# Altium PCB final.PcbDoc
Units mm, origin at the board's own origin, x right, y up, seen from the top; angles counter-clockwise.
Board outline 50 x 40 mm, 2 copper layers (Top Layer, Bottom Layer); 29 components, 28 nets, 114 pads, 26 vias.
Unrouted connection lines stored in the file: 75.
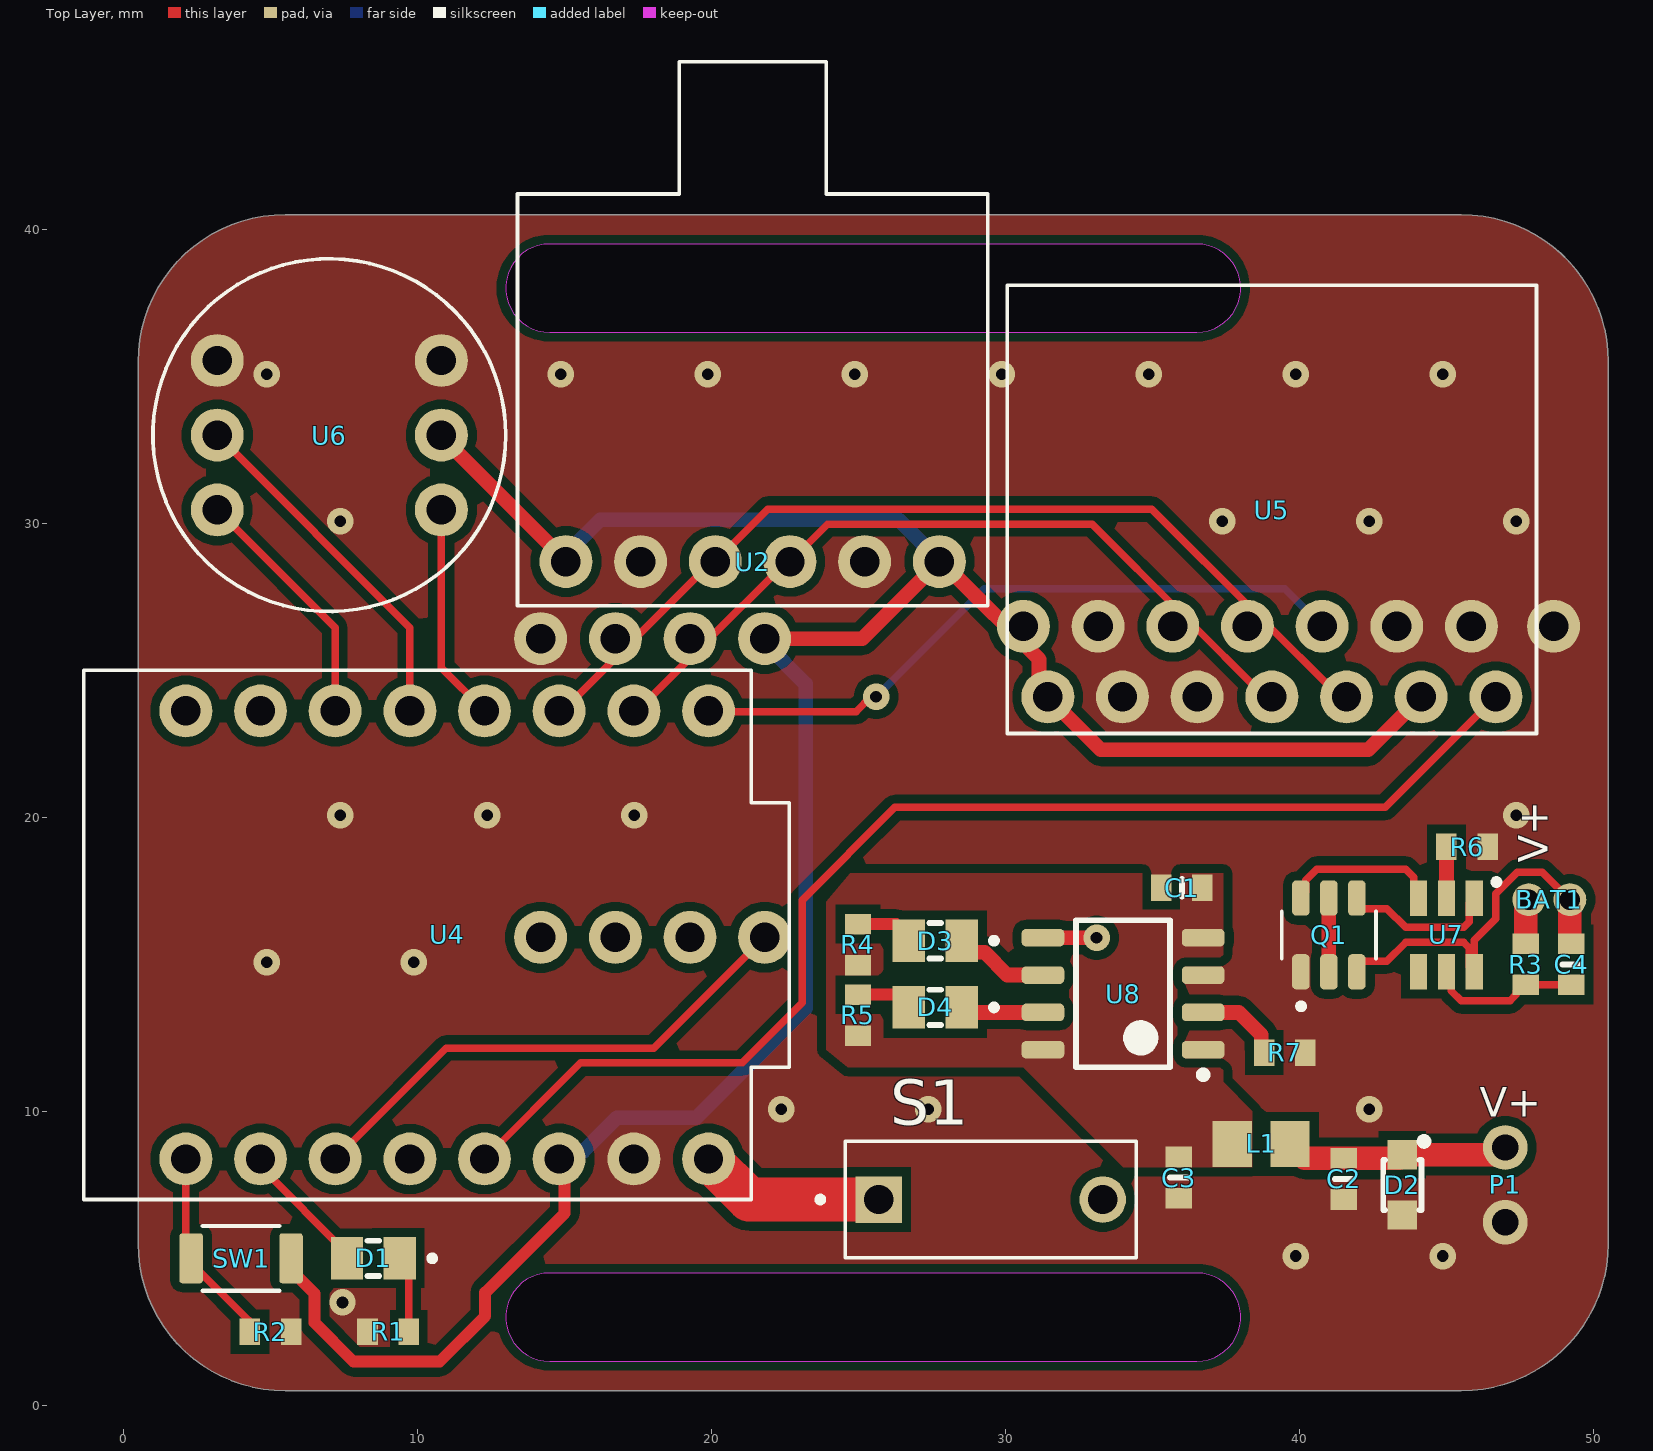
[diagram p0: Top Layer view]
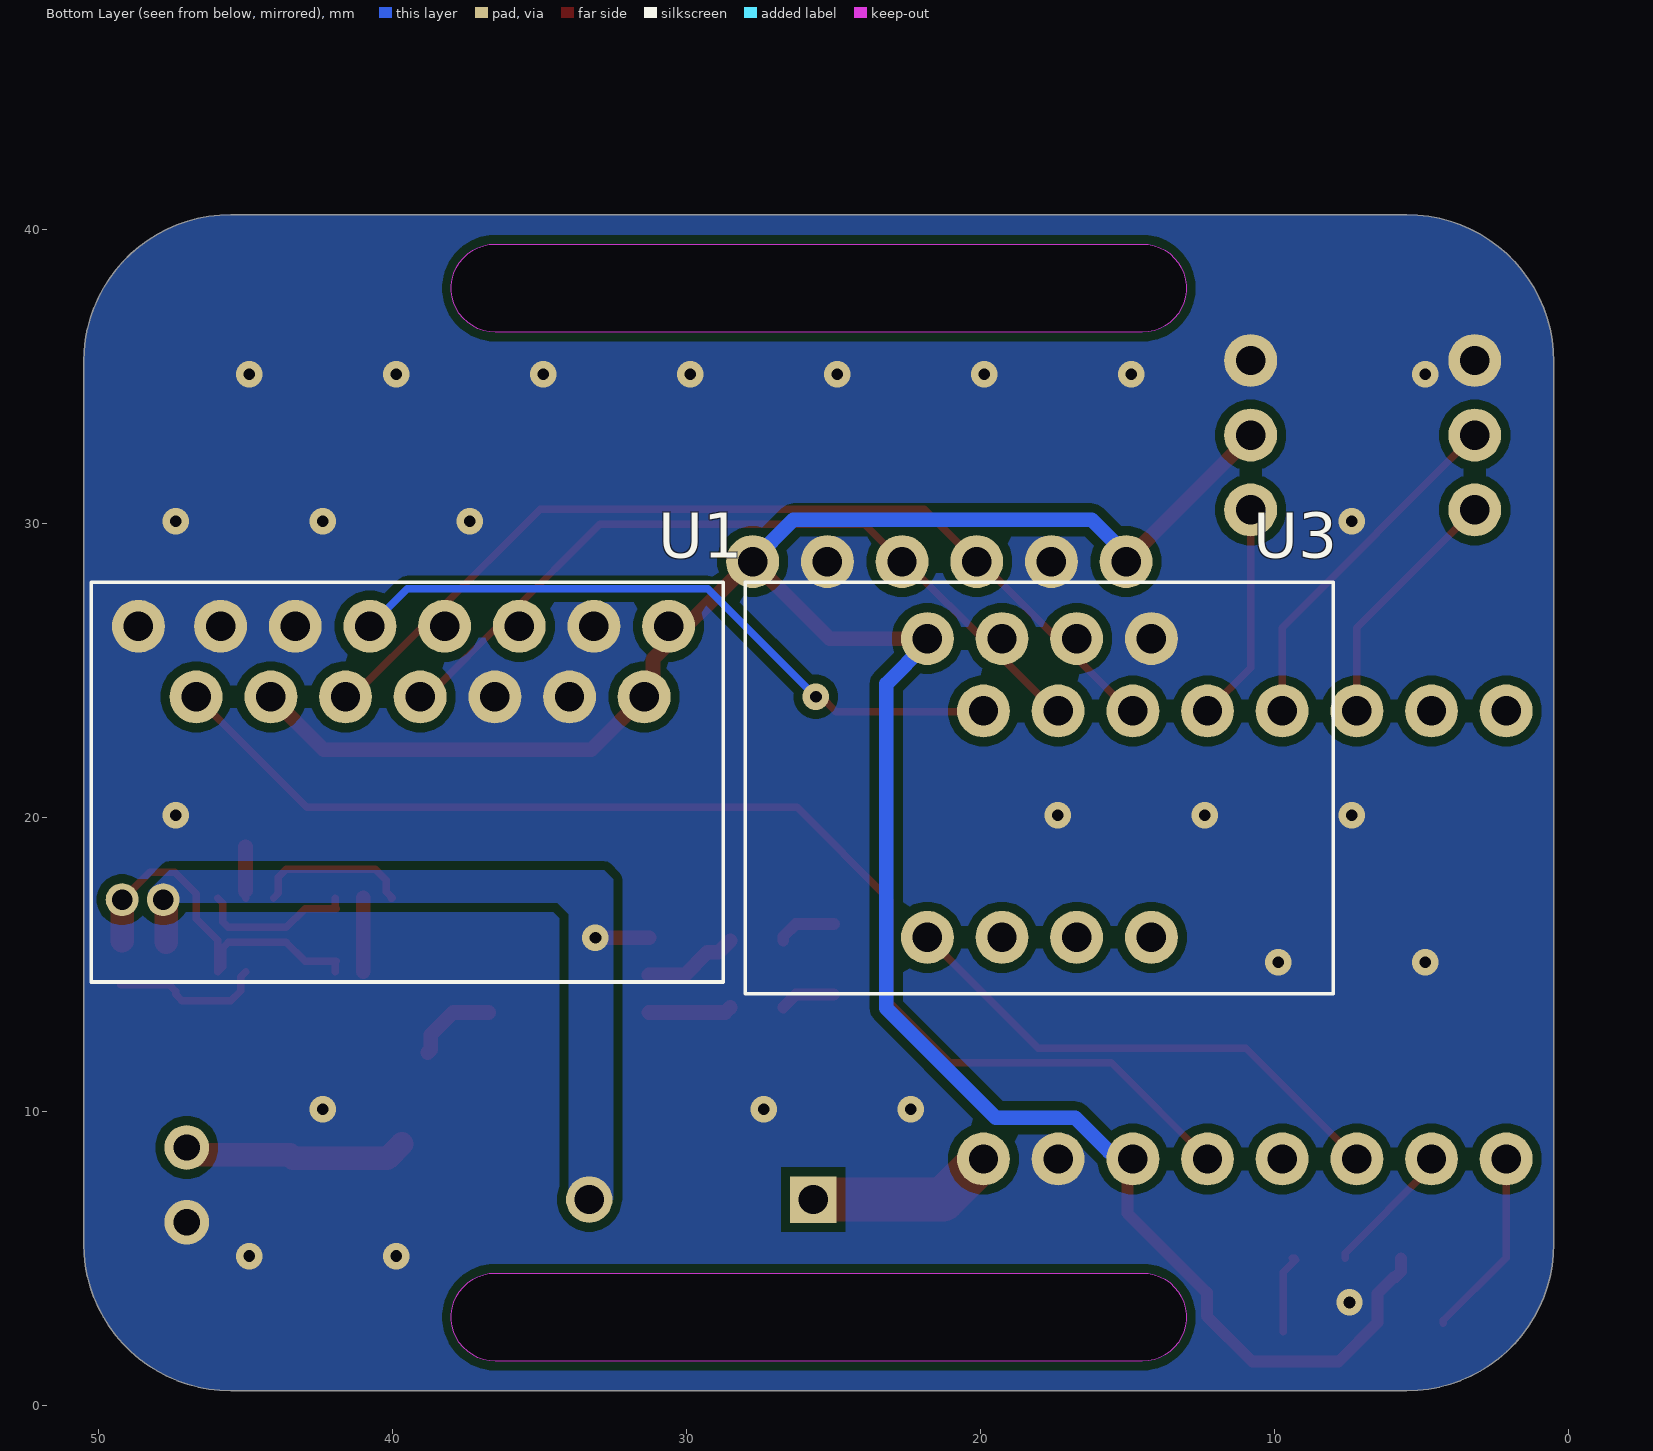
[diagram p1: Bottom Layer view, seen from below]
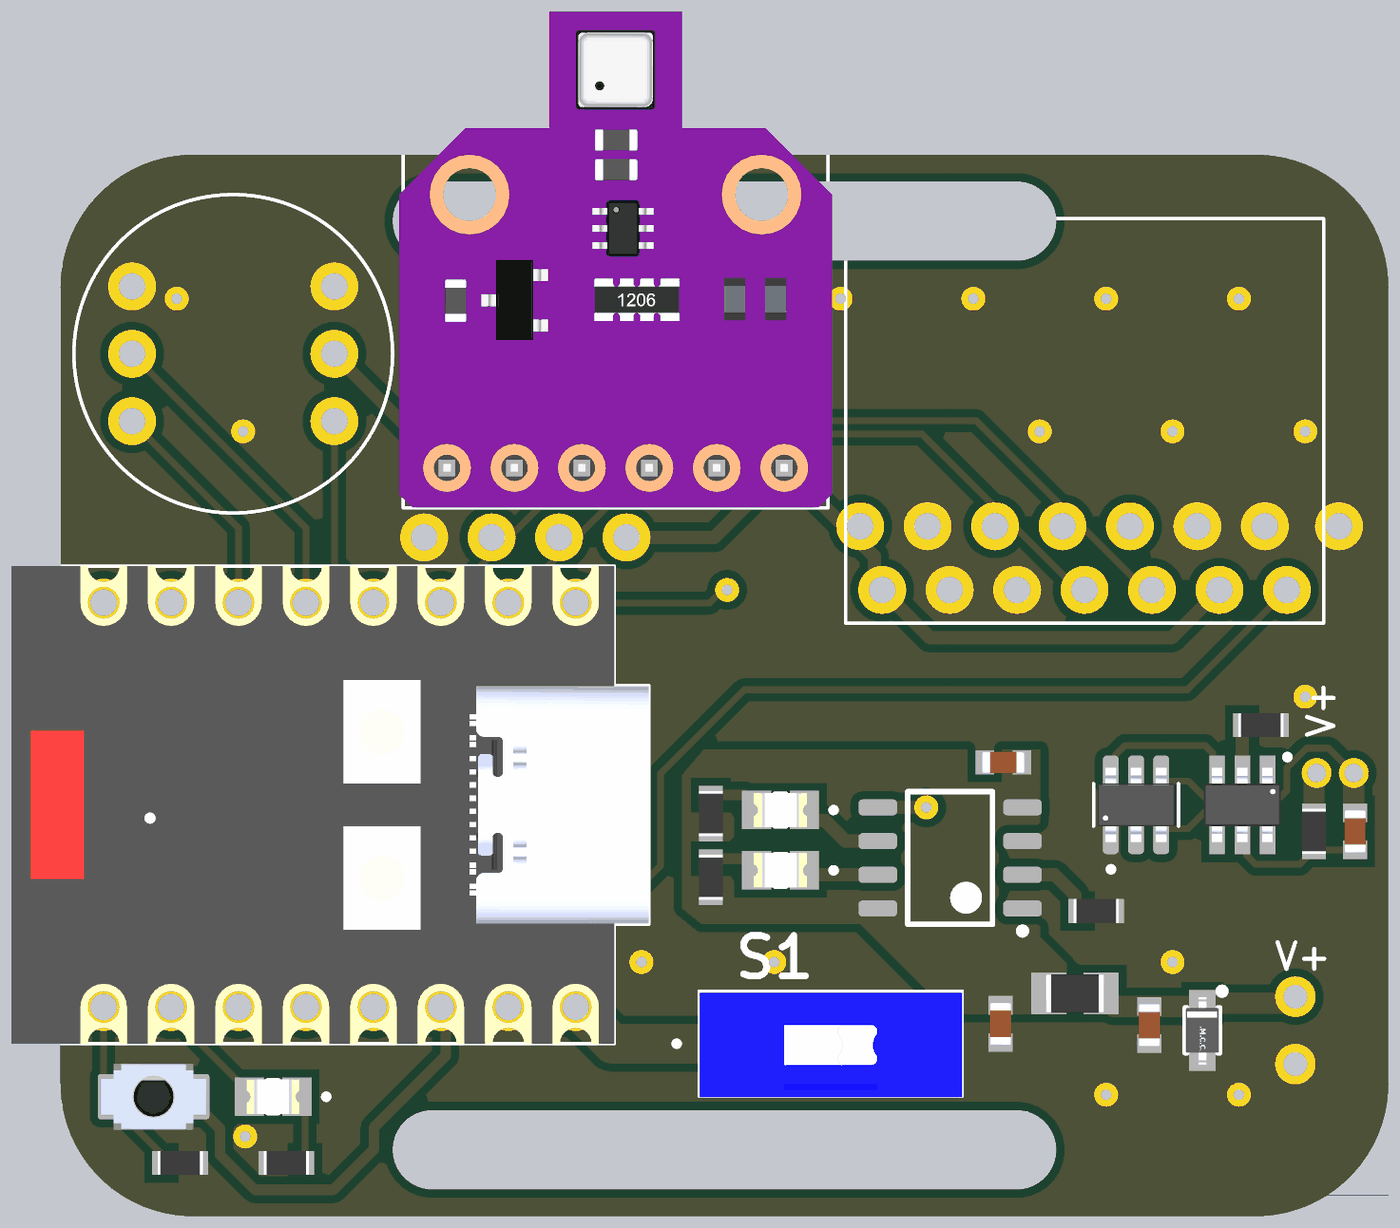
[diagram p2: 3D render of the assembled board from above, using the file's embedded part models]

## Layer stack, top to bottom
Top Solder: solder mask 0.0102, Solder Resist, Dk 3.5
Top Layer: signal copper 0.0356
Dielectric 1: dielectric 0.32, FR-4, Dk 4.8
Bottom Layer: signal copper 0.0356
Bottom Solder: solder mask 0.0102, Solder Resist, Dk 3.5

## Board outline
0.5,5.5 0.5,35.5 0.498,35.502 cw(c5.498,35.502) 5.498,40.502 5.5,40.5 45.5,40.5 45.502,40.502 cw(c45.502,35.502) 50.502,35.502 50.5,35.5 50.5,5.498 50.502,5.498 cw(c45.502,5.498) 45.502,0.498 45.5,0.5 5.5,0.5 5.498,0.498 cw(c5.498,5.498)
cut-out: 14.5,39.5 ccw(c14.5,38) 14.5,36.5 36.5,36.5 ccw(c36.5,38) 36.5,39.5
cut-out: 14.5,4.5 ccw(c14.5,3) 14.5,1.5 36.5,1.5 ccw(c36.5,3) 36.5,4.5

## Design rules (kind name [scope] priority, off if disabled: settings)
Clearance [All] p1: gap=0.3 ignorepadtopadclearanceinfootprint=FALSE except(0.25: Arc-Arc Arc-Track Arc-SMDPad Arc-THPad Arc-Via Arc-Text Arc-Hole Track-Track Track-SMDPad Track-THPad Track-Via Track-Text Track-Hole SMDPad-SMDPad SMDPad-THPad SMDPad-Via SMDPad-Text SMDPad-Hole THPad-THPad THPad-Via THPad-Text THPad-Hole Via-Via Via-Text Via-Hole Text-Text Text-Hole)
PolygonConnect [All] p1: connectstyle=Direct reliefconductorwidth=0.254 reliefentries=4 polygonreliefangle="90 Angle" airgapwidth=0.254
RoutingVias [All] p1: holewidth=0.4 width=0.9 viastyle="Through Hole" minholewidth=0.4 minwidth=0.9 maxholewidth=1 maxwidth=2
SolderMaskExpansion [All] p1: expansion=0 istentingtop=FALSE
SupplyNets "Schematic Supply Nets_3" [InNet('+VOUT')] p1: voltage=0.000
SupplyNets "Schematic Supply Nets_2" [InNet('+5V')] p2: voltage=0.000
SupplyNets "Schematic Supply Nets_1" [InNet('+3V3')] p3: voltage=0.000
SupplyNets "Schematic Supply Nets" [InNet('GND')] p4: voltage=0.000
Width [All] p1: maxlimit=2 minlimit=0.25 preferedwidth=0.254
30 further rules are at their usual default settings.

## Components (designator, comment, footprint, x,y, rotation, side; value= is the part's Value field where it differs from the comment)
BAT1 "Battery Input" "Battery Input-Footprint-1" 48.5,17.2 r0 top
C1 "Capacitor 0603" "Capacitor 0603-Footprint-1" 36,17.6 r0 top value=10uF
C2 "Capacitor 0603" "Capacitor 0603-Footprint-1" 41.5,7.7 r90 top value=100nF
C3 "Capacitor 0603" "Capacitor 0603-Footprint-1" 35.9,7.747 r90 top value=100nF
C4 "Capacitor 0603" "Capacitor 0603-Footprint-1" 49.25,15 r270 top value=100nF
D1 "LED 0805" LEDC2012X120N 8.5,5 r180 top
D2 "ESD5V0D3-TP" FP-SOD-323-IPC_B 43.5,7.5 r270 top
D3 "LED 0805" LEDC2012X120N 27.609,15.805 r180 top
D4 "LED 0805" LEDC2012X120N 27.609,13.535 r180 top
L1 "Ferrite Bead" INDC2013X105X50ML20T20 38.7,8.89 r180 top
P1 "Magnetic Connector 2-Pin 2.54mm" "Magnetic Connector 2-Pin 2.54mm-Footprint-1" 47,7.5 r270 top
Q1 "FS8205" SOT95P280X145-6N#1 41,16 r90 top
R1 "Resistor 0603" RESC1608X55X25NL10T15 9,2.5 r0 top value=1K
R2 "Resistor 0603" RESC1608X55X25NL10T15 5,2.5 r0 top value=1K
R3 "Resistor 0603" RESC1608X55X25NL10T15 47.7,15 r270 top value=100
R4 "Resistor 0603" RESC1608X55X25NL10T15 24.984,15.67 r270 top value=1K
R5 "Resistor 0603" RESC1608X55X25NL10T15 24.984,13.27 r270 top value=1K
R6 "Resistor 0603" RESC1608X55X25NL10T15 45.7,19 r180 top value=1K
R7 "Resistor 0603" RESC1608X55X25NL10T15 39.5,12 r180 top value=10K
S1 "DS01-254-L-01BE" SW_DS01-254-L-01BE 29.5,7 r270 top
SW1 "B3U-1000P-B" OMRON-B3U-1000P-2-B_V 4,5 r0 top
U1 "MAX30205 Module" "MAX30205 Module-Footprint-1" 39.5,26.5 r0 bottom
U2 "BME680 Module" "BME680 Module-Footprint-1" 21.4,28.7 r0 top
U3 "MAX30102 Module" "MAX30102 Module-Footprint-1" 18,21 r0 bottom
U4 "ESP32-C3 SUPERMINI" MODULE_ESP32-C3_SUPERMINI_TH 10,16 r270 top
U5 "BMI270 Module" "BMI270 Module-Footprint-1" 39.06,24.1 r0 top
U6 "ICS43434 Module" "ICS43434 Module-Footprint-1" 7,33 r0 top
U7 "DW01A" SOT95P280X145-6N#2 45,16 r270 top
U8 "TP4056" SOP127P600X200-8N 34,14 r180 top

## Footprints (in the part's own frame and the unit in brackets; to place one, negate y for a bottom-side part, rotate by r counter-clockwise, add the part's x,y. Pads: shape width x height; smd on the part's side, far side on the other; paste and mask are expansions set on the pad)
"Battery Input-Footprint-1" [mm]
  round 1.12 hole 0.7: 1(-0.7,0) 2(0.7,0)
"BME680 Module-Footprint-1" [mm]
  round 1.8 hole 1: 1(-6.35,0) 2(-3.81,0) 3(-1.27,0) 4(1.27,0) 5(3.81,0) 6(6.35,0)
  silkscreen extent -8,-1.5 8,17, body extent -8.15,-1.5 8.15,17.2, height 5.3
"BMI270 Module-Footprint-1" [mm]
  round 1.8 hole 1: 1(-7.62,0) 2(-5.08,0) 3(-2.54,0) 4(0,0) 5(2.54,0) 6(5.08,0) 7(7.62,0)
  round 0 all layers, no hole: 8(-2.54,12.7) 9(0,12.7) 10(2.54,12.7)
  silkscreen extent -9,-1.25 9,14
"Capacitor 0603-Footprint-1" [mm]
  rect 0.7x0.9 smd: 1(-0.7,0) 2(0.7,0)
  silkscreen extent 0,-0.3 0,0.3, body extent -0.8,-0.4 0.8,0.4, height 0.95
FP-SOD-323-IPC_B [mm]
  rect 1x1 smd paste+0 mask+0: 1(-1.026,0) 2(1.026,0)
  silkscreen extent -1.6,-0.65 0.85,0.86, body extent -1.95,-0.87 1.95,0.87, height 0.25
"ICS43434 Module-Footprint-1" [mm]
  round 1.8 hole 1: 1(-3.81,2.54) 2(-3.81,0) 3(-3.81,-2.54) 4(3.81,-2.54) 5(3.81,0) 6(3.81,2.54)
  silkscreen extent -6,-6 6,6
INDC2013X105X50ML20T20 [mm] "Chip Inductor, 2-Leads, Body 2.2x1.45mm, IPC Low Density"
  rect 1.33x1.57 smd: 1(-0.985,0) 2(0.985,0)
  body extent -1.1,-0.72 1.1,0.72, height 1.05
LEDC2012X120N [mm]
  rect 1.1x1.45 smd: A(0.9,0) C(-0.9,0)
  silkscreen extent -2.1,-0.6 0.2,0.6, body extent -1,-0.65 1,0.65, height 0.9
"Magnetic Connector 2-Pin 2.54mm-Footprint-1" [mil]
  round 60 hole 35.43: 1(-50,0) 2(50,0)
"MAX30102 Module-Footprint-1" [mm]
  round 1.8 hole 1: 1(-3.81,-5.08) 2(-1.27,-5.08) 3(1.27,-5.08) 4(3.81,-5.08) 5(-3.81,5.08) 6(-1.27,5.08) 7(1.27,5.08) 8(3.81,5.08)
  silkscreen extent -10,-7 10,7
"MAX30205 Module-Footprint-1" [mm]
  round 1.8 hole 1: 1(-8.89,0) 2(-6.35,0) 3(-3.81,0) 4(-1.27,0) 5(1.27,0) 6(3.81,0) 7(6.35,0) 8(9.144,0)
  silkscreen extent -10.75,-1.5 10.75,12.1
MODULE_ESP32-C3_SUPERMINI_TH [mm]
  round 1.8 hole 1: 0(7.62,-7.88) 1(7.62,-5.34) 2(7.62,-2.8) 3(7.62,-0.26) 3.3(7.62,4.82) 4(7.62,2.28) 5(-7.62,9.9) 5V(7.62,9.9) 6(-7.62,7.36) 7(-7.62,4.82) 8(-7.62,2.28) 9(-7.62,-0.26) 10(-7.62,-2.8) 20(-7.62,-5.34) 21(-7.62,-7.88) G(7.62,7.36)
  silkscreen extent -9,-11.35 9,12.65, body extent -9,-11.35 9,12.65, height 4.16
OMRON-B3U-1000P-2-B_V [mm] "SMT, 2-Leads, Body 3x2.5mm"
  rrect25% 0.8x1.7 smd: 1(-1.7,0) 2(1.7,0)
  silkscreen extent -1.3,-1.1 1.3,1.1, body extent -2,-1.25 2,1.25, height 1.6
RESC1608X55X25NL10T15 [mm] "Chip Resistor, 2-Leads, Body 1.70x0.90mm, IPC Medium Density"
  rect 0.7x0.9 smd: 1(-0.7,0) 2(0.7,0)
  body extent -0.85,-0.45 0.85,0.45, height 0.55
SOP127P600X200-8N [mm] "SOP, 8-Leads, Body 4.90x3.90mm, Pitch 1.27mm, IPC Medium Density"
  rrect50% 1.45x0.6 smd: 1(-2.725,1.905) 2(-2.725,0.635) 3(-2.725,-0.635) 4(-2.725,-1.905) 5(2.725,-1.905) 6(2.725,-0.635) 7(2.725,0.635) 8(2.725,1.905)
  silkscreen extent -2.85,-2.5 1.6,2.88, body extent -2,-2.5 2,2.5, height 2
SOT95P280X145-6N#1 [mm]
  rrect50% 1.2x0.6 smd: 1(-1.255,0.95) 2(-1.255,0) 3(-1.255,-0.95) 4(1.255,-0.95) 5(1.255,0) 6(1.255,0.95)
  silkscreen extent -2.53,-1.6 0.8,1.6, body extent -1.4,-1.45 1.4,1.45, height 1.45
SOT95P280X145-6N#2 [mm]
  rect 1.21x0.59 smd: 1(-1.255,0.95) 2(-1.255,0) 3(-1.255,-0.95) 4(1.255,-0.95) 5(1.255,0) 6(1.255,0.95)
  silkscreen extent -1.9,1.6 -1.7,1.8, body extent -1.4,-1.45 1.4,1.45, height 1.45
SW_DS01-254-L-01BE [mm]
  rect 1.58x1.58 / inner round 1.58 / far side rect 1.58x1.58 hole 1: 1A(0,-3.81)
  round 1.58 hole 1: 1B(0,3.81)
  silkscreen extent -1.98,-5.9 1.98,4.95, body extent -1.93,-4.95 2.03,4.95, height 5.18

## Part data
BAT1: library part CMP-002-00072-1, Pins=2
C1 C2 C3 C4: library part CMP-001-00084-1, Case/Package=0603, Mounting Technology=SMD, Pins=2
D1 D3 D4: library part CMP-004-00043-1, "LED;Red;11mcd;0.061In.Dia.;SMD;100mA;2V Vf;635nm;140deg;SMD;White Diffused;5V Vr", Case/Package="0805 Lumex", Check_prices=https://www.snapeda.com/parts/SML-LXT0805IW-TR/Lumex+Opto%252FComponents+Inc./view-part/?ref=eda, Component Type=Standard, Design Item ID=SML-LXT0805IW-TR, MF="Lumex Opto/Components", MP=SML-LXT0805IW-TR, Pins=2, SnapEDA_Link=https://www.snapeda.com/parts/SML-LXT0805IW-TR/Lumex+Opto%252FComponents+Inc./view-part/?ref=snap, Source=SML-LXT0805IW-TR.SchLib
D2: library part CMP-56244-000003-1, "TVS DIODE 5V 15.5V SOD323", Breakdown Voltage=7.3V, Capacitance=350pF, Clamping Voltage=15.5V, Leakage Current=1uA, Max Operating Temperature=150°C, Max Power Dissipation=200mW, Min Breakdown Voltage=6.2V, Min Operating Temperature=-55°C, Package Quantity=1, Peak Pulse Current=15A, Peak Pulse Power=350W, Power Line Protection=No, Reverse Standoff Voltage=5V, Composition=Zener, Depth=1.35mm, Element Configuration=Single, Length=1.8mm, Max Breakdown Voltage=7.3V, Mount="Surface Mount", Number Of Channels=1, Number of Pins=2, Number of Unidirectional Channels=1, Packaging="Tape and Reel", Radiation Hardening=No, Termination=SMD/SMT, Working Voltage=5V
L1: library part CMP-006-00000-3, "IND, Chip Ferrite Bead, 330 Ohm, +/- 25%, 1.5 A, -55 to 125 degC, 0805 (2012 Metric), Tape and Reel", Case/Package=0805, Current Rating=1.5A, Manufacturer=Murata, Max Operating Temperature=125°C, Min Operating Temperature=-55°C, Package Description="2-Pin Surface Mount Device, Body 2 x1.25 mm", Package Quantity=4000, Resistance=90mohm, Tolerance=25%, Core Material=Ferrite, Datasheet URL=http://psearch.en.murata.com/inductor/product/LQG15HS15NJ02_.pdf, Datasheet Version=Nov-11, Impedance=330Ohm, Max Current Rating=1.5A, Mounting Technology=SM, Package Reference=0805, Packaging=TapeandReel, RoHS Compliant=True
P1: library part CMP-002-00075-1, Pins=2
Q1: library part CMP-061-000000-2, "20V 9A 1.5W Surface Mount SOT-23-6", Package=Package, Component Type=Standard, Design Item ID=FS8205, MF="Fortune Semiconductor", MP=FS8205, Pin Count=6, SnapEDA_Link=https://www.snapeda.com/parts/FS8205/Fortune+Semiconductor/view-part/?ref=snap, Source=FS8205.SchLib
R1 R2 R3 R4 R5 R6 R7: library part CMP-009-00179-1, Mounting Technology=SMT, Pins=2
S1: library part CMP-011-00014-2, "1 Position, Through Hole, 2.54 mm Pitch, Raised Slide Actuator, Flat Bottom, Long Pin, DIP Switch", Case/Package=None, Check_prices=https://www.snapeda.com/parts/DS01-254-L-01BE/Same+Sky/view-part/?ref=eda, Component Type=Standard, Design Item ID=DS01-254-L-01BE, MF="Same Sky", MP=DS01-254-L-01BE, Pins=2, SnapEDA_Link=https://www.snapeda.com/parts/DS01-254-L-01BE/Same+Sky/view-part/?ref=snap, Source=DS01-254-L-01BE.SchLib
SW1: library part CMP-011-00011-3, "Ultra-small Surface-mounting Tactile Switches with High Contact Reliability, SPST-NO, -25 to 70 degC, 2-Pin SMD, RoHS, Tape and Reel", Current Rating=50mA, Voltage Rating=12V, Pins=2, RoHS Compliant=Details
U1: library part CMP-00030-00001-1, Pins=8
U2: library part CMP-00000-2
U3: library part CMP-031-00023-1, Pins=8
U4: library part CMP-067-000000-2, Package=Package, Check_prices=https://www.snapeda.com/parts/ESP32-C3%20SuperMini_TH/Espressif+Systems/view-part/?ref=eda, Component Type=Standard, Design Item ID=ESP32-C3_SUPERMINI_TH, MF="Espressif Systems", MP="ESP32-C3 SuperMini_TH", Pin Count=16, SnapEDA_Link=https://www.snapeda.com/parts/ESP32-C3%20SuperMini_TH/Espressif+Systems/view-part/?ref=snap, Source=ESP32-C3_SUPERMINI_TH.SchLib
U5: library part CMP-00030-00002-1, Pins=10
U6: library part CMP-00027-00002-1, Pins=6
U7: library part CMP-031-00022-3, "One Cell Lithium-ion/Polymer Battery Protection IC", Case/Package="SOT-23-6 Fortune Semiconductor", Check_prices=https://www.snapeda.com/parts/DW01A/Fortune+Semiconductor/view-part/?ref=eda, Component Type=Standard, Design Item ID=DW01A, MF="Fortune Semiconductor", MP=DW01A, Pins=6, SnapEDA_Link=https://www.snapeda.com/parts/DW01A/Fortune+Semiconductor/view-part/?ref=snap, Source=DW01A.SchLib
U8: library part CMP-019-00049-1, "IC Socket, 16 Contact(s), 2.54mm Term Pitch, 1.014inch Row Spacing, Surface Mount", Case/Package=ESOP8, Pins=8

## Via types
v1: diameter 0.9, hole 0.4, Top Layer to Bottom Layer, 26 vias

## Nets (pads, with @x,y where several pads share a name; then routed paths per layer and width w, separated by ;. In a path a pad name is that pad's centre, name@x,y a point inside that pad or via, vN(x,y) a via of type N, cw(c..) or ccw(c..) an arc to the next point about the centre after c; other vN are vias at no path point)
+3V3: SW1.2 U1.1 U2.1 U2.6 U3.4 U4.3.3 U5.1 U5.6 U6.5 | length 87.2
  Top Layer w0.4: SW1.2 5.7,4.55 5.9,4.35 5.95,4.35 6.5,3.8 6.5,2.812 7.821,1.49 10.756,1.49 12.3,3.035 12.3,3.835 15.003,6.537 15.003,8.197 U4.3.3
  Top Layer w0.5: U6.5 11,33 11,32.78 15.05,28.73 U2.1 ; U3.4 25.13,26.08 U2.6 ; U2.6@28.148,28.367 31.144,25.371 31.144,24.056 31.3,23.9 31.44,24.04 U5.1 33.24,22.3 42.34,22.3 U5.6
  Bottom Layer w0.5: U4.3.3 15.069,8.629 15.629,8.629 16.78,9.78 19.48,9.78 23.21,13.51 23.21,24.533 21.81,25.933 U3.4 ; U2.1 15.05,28.95 16.22,30.12 26.366,30.12 U2.6@27.75,28.736
+5V: C1.2 C3.2 L1.2 R4.2 R5.2 U8.4 U8.8
+VOUT: BAT1.1 R3.1 S1.1B U8.5 | length 3.3
  Top Layer w0.5: U8.5 v1(33.1,15.905)
  Top Layer w0.8: R3.1@47.7,15.75 BAT1.1@47.7,17 ; BAT1.1@47.7,17.013 47.8,17.113 BAT1.1
BMI270_INT1: U4.4 U5.7 | length 43
  Top Layer w0.254: U4.4 15.546,11.646 21.046,11.646 23.087,13.687 23.087,17.187 26.24,20.34 42.92,20.34 46.58,24 46.6,24 46.68,24.08 U5.7
BUTTON: R2.1 SW1.1 U4.0 | length 6.5
  Top Layer w0.254: U4.0 2.12,8.216 2.032,8.128 2.12,8.04 2.12,5.027 4.253,2.894 R2.1@4.253,2.794
GND: C1.1 C2.1 C3.1 D2.2 P1.2 Q1.1 R1.1 R2.2 R6.1 R7.1 U1.2 U1.6 U1.7 U1.8 U2.2 U2.5 U3.1 U4.G U5.2 U5.3 U6.1 U6.6 U8.1 U8.3
  other v1: 7.45,3.5 39.874,5.075 44.874,5.075 22.374,10.075 27.374,10.075 42.374,10.075 4.874,15.075 9.874,15.075 7.374,20.075 12.374,20.075 17.374,20.075 47.374,20.075 7.374,30.075 37.374,30.075 42.374,30.075 47.374,30.075 4.874,35.075 14.874,35.075 19.874,35.075 24.874,35.075 29.874,35.075 34.874,35.075 39.874,35.075 44.874,35.075
ICS43434_SCK: U4.10 U6.3 | length 8.5
  Top Layer w0.254: U6.3 7.2,26.45 U4.10
ICS43434_SD: U4.8 U6.4 | length 7.4
  Top Layer w0.254: U6.4 10.81,25.09 U4.8
ICS43434_WS: U4.9 U6.2 | length 12.2
  Top Layer w0.254: U6.2 3.282,33 3.302,33.02 3.302,32.888 9.74,26.45 U4.9
LED: D1.A U4.1 | length 4.6
  Top Layer w0.254: U4.1 4.66,8.294 4.699,8.255 4.699,8.076 7.6,5.175 D1.A
MAX30102_INT: U3.8 U4.2 | length 17.7
  Top Layer w0.254: U4.2 10.97,12.15 18.04,12.15 U3.8
NetBAT1_2: BAT1.2 C4.1 Q1.3 U7.6 | length 13.2
  Top Layer w0.254: Q1.3 41.95,15.069 41.91,15.109 42.975,15.109 43.61,15.744 45.593,15.744 45.782,15.555 45.782,14.913 U7.6 45.95,15.822 46.681,16.553 46.681,17.406 47.412,18.137 48.263,18.137 BAT1.2 ; C4.1@49.2,15.8 49.25,15.75 C4.1
  Top Layer w0.8: C4.1@49.2,15.8 BAT1.2
NetC2_2: C2.2 D2.1 L1.1 P1.1 | length 7.7
  Top Layer w0.8: L1.1 40.175,8.4 C2.2 43.374,8.4 D2.1 46.56,8.526 46.804,8.77 P1.1
NetC4_2: C4.2 R3.2 U7.5 | length 5.2
  Top Layer w0.254: U7.5 45.168,14.577 45.168,14.094 45.499,13.763 47.163,13.763 47.377,13.977 47.377,14.077 47.6,14.3 C4.2
NetD1_C: D1.C R1.2 | length 2.8
  Top Layer w0.254: D1.C 9.318,5 9.271,4.953 9.7,4.524 R1.2
NetD3_A: D3.A R4.1 | length 2
  Top Layer w0.4: R4.1 26.286,16.37 26.709,15.947 D3.A
NetD3_C: D3.C U8.6 | length 3.3
  Top Layer w0.5: D3.C 28.905,15.409 29.291,15.409 30.065,14.635 U8.6
NetD4_A: D4.A R5.1 | length 1.9
  Top Layer w0.4: R5.1 26.286,13.97 26.709,13.547 D4.A
NetD4_C: D4.C U8.7 | length 2.8
  Top Layer w0.5: D4.C 28.679,13.365 U8.7
NetQ1_2: Q1.2 Q1.5 | length 2.5
  Top Layer w0.5: Q1.2 Q1.5
NetQ1_4: Q1.4 U7.1 | length 5.5
  Top Layer w0.254: Q1.4 41.95,16.931 41.91,16.891 42.975,16.891 43.61,16.256 45.593,16.256 45.782,16.445 45.782,17.087 U7.1
NetQ1_6: Q1.6 U7.3 | length 5.4
  Top Layer w0.254: Q1.6 40.022,17.255 40.005,17.272 40.209,17.476 40.209,17.857 40.588,18.236 43.613,18.236 43.882,17.967 43.882,17.423 U7.3
NetR6_2: R6.2 U7.2 | length 1.8
  Top Layer w0.254: U7.2 45,17.3 45.1,17.4 U7.2@45,17.5
  Top Layer w0.5: U7.2@45,17.5 R6.2
NetR7_2: R7.2 U8.2 | length 2.9
  Top Layer w0.5: U8.2 37.935,13.365 38.7,12.6 38.7,12.1 R7.2
NetS1_1A: S1.1A U4.5V | length 6.4
  Top Layer w1.5: U4.5V 21.28,7 S1.1A
OS: U1.5 U4.5 | length 23.1
  Top Layer w0.254: U4.5 19.98,23.62 20,23.6 24.925,23.6 25.425,24.1 v1(25.6,24.1)
  Bottom Layer w0.254: v1(25.6,24.1) 29.277,27.777 39.493,27.777 U1.5
SCL: U1.4 U2.3 U3.2 U4.7 U5.5 | length 32.3
  Top Layer w0.254: U4.7 14.935,23.62 17.063,25.747 20.015,28.7 U2.3 21.911,30.481 34.983,30.481 38.597,26.867 41.364,24.1 U5.5
SDA: U1.3 U2.4 U3.3 U4.6 U5.4 | length 26.8
  Top Layer w0.254: U4.6 17.475,23.62 19.603,25.747 22.555,28.7 U2.4 23.947,29.977 32.947,29.977 36.057,26.867 38.824,24.1 U5.4
pads on no net: U3.5 U3.6 U3.7 U4.3 U4.20 U4.21 U5.8 U5.9 U5.10 U7.4

## Polygon pours and split planes (outlines as drawn)
GND on Bottom Layer "GND_L02_P004" (solid, pour order 4): 0.5,5.5 0.5,35.5 0.498,35.502 cw(c5.498,35.502) 5.498,40.502 5.5,40.5 45.5,40.5 45.502,40.502 cw(c45.502,35.502) 50.502,35.502 50.5,35.5 50.5,5.498 50.502,5.498 cw(c45.502,5.498) 45.502,0.498 45.5,0.5 5.5,0.5 5.498,0.498 cw(c5.498,5.498)
+VOUT on Bottom Layer "+VOUT_L02_P000" (solid, pour order 0): 32.5,7 32.5,17.9 32.8,18.2 47.6,18.2 48.3,17.5 48.3,17.1 34.4,17.1 34,16.7 34,7
GND on Top Layer "GND_L01_P003" (solid, pour order 3): 0.5,5.5 0.5,35.5 0.498,35.502 cw(c5.498,35.502) 5.498,40.502 5.5,40.5 45.5,40.5 45.502,40.502 cw(c45.502,35.502) 50.502,35.502 50.5,35.5 50.5,5.498 50.502,5.498 cw(c45.502,5.498) 45.502,0.498 45.5,0.5 5.5,0.5 5.498,0.498 cw(c5.498,5.498)
+5V on Top Layer "+5V_L01_P002" (solid, pour order 2): 37.4,18.1 37.4,11 38.4,10 38.4,8.1 34,8.1 32,10.1 31.3,10.8 30.6,11.5 24.641,11.5 23.903,12.097 23.903,17.135 24.728,18.1 36.4,18.1

## Silkscreen, mask and mechanical layers (free items; w line width, h text height)
Route Tool Path:
  lines w0.254: 0.498,5.498 ccw(c5.498,5.498) 5.498,0.498 ; 0.498,35.502 cw(c5.498,35.502) 5.498,40.502 ; 0.5,5.5 0.5,35.5 ; 5.5,0.5 45.5,0.5 ; 5.5,40.5 45.5,40.5 ; 45.502,0.498 ccw(c45.502,5.498) 50.502,5.498 ; 45.502,40.502 cw(c45.502,35.502) 50.502,35.502 ; 50.5,5.498 50.5,35.5 ; 14.5,1.5 cw(c14.5,3) 14.5,4.5 36.5,4.5 cw(c36.5,3) 36.5,1.5 14.5,1.5 ; 14.5,36.5 cw(c14.5,38) 14.5,39.5 36.5,39.5 cw(c36.5,38) 36.5,36.5 14.5,36.5

## Text inside footprints (layer, text, board x,y; h text height)
BAT1: Top Overlay "V+" at 48.447,18.453 h1 r90
P1: Top Overlay "V+" at 46.136,9.811 h1